# Altium PCB smoothPCB.pcbdoc (part 2 of 2)
Units mm, origin at the board's own origin, x right, y up, seen from the top; angles counter-clockwise.
Board outline 116.3 x 89.84 mm, 2 copper layers (Top Layer, Bottom Layer); 42 components, 86 nets, 257 pads, 168 vias.
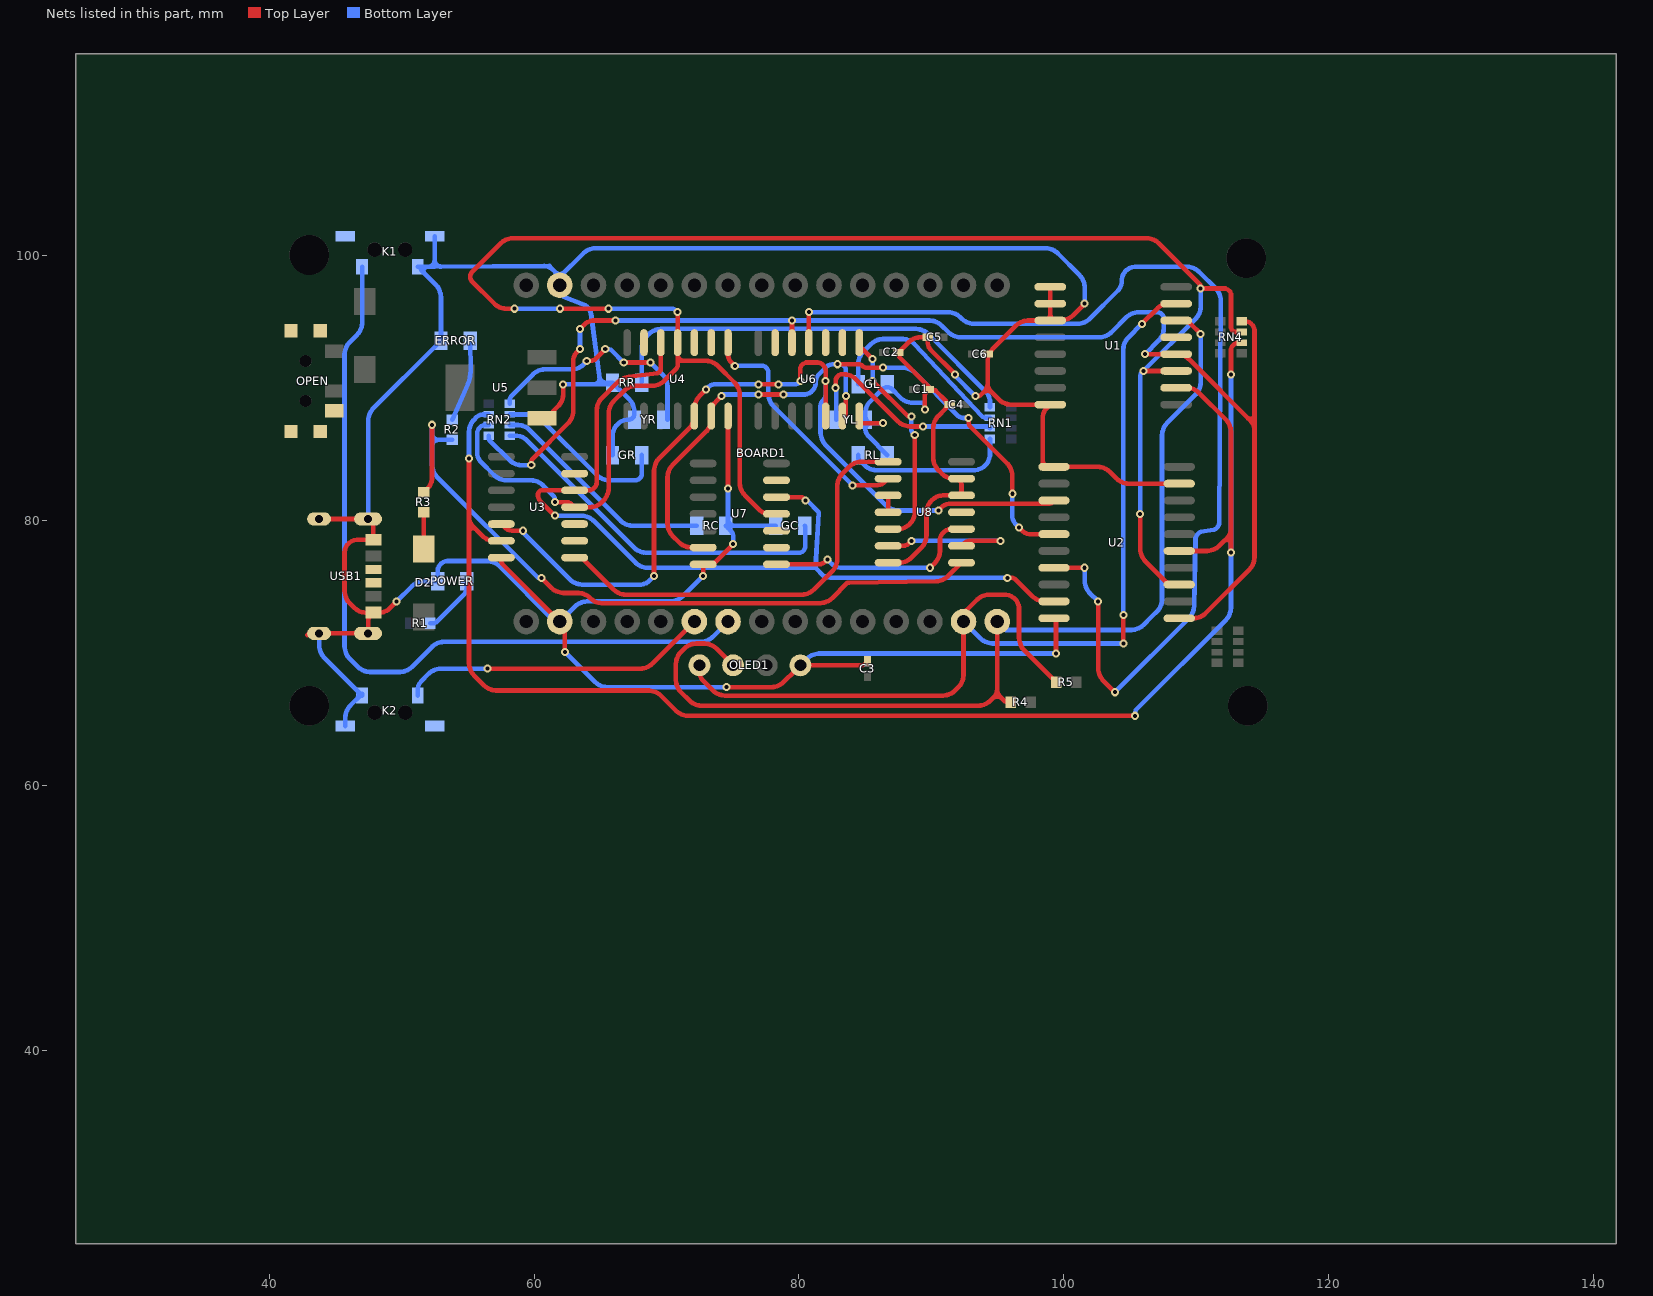
[diagram p2: the nets of this part, all layers, seen from the top]

## Via types
v1: diameter 0.61, hole 0.305, Top Layer to Bottom Layer, 168 vias

## Nets (pads, with @x,y where several pads share a name; then routed paths per layer and width w, separated by ;. In a path a pad name is that pad's centre, name@x,y a point inside that pad or via, vN(x,y) a via of type N, cw(c..) or ccw(c..) an arc to the next point about the centre after c; other vN are vias at no path point) (continued)
E`: U2.3 U3.5 U4.5 U6.5 | length 67.9
  Top Layer w0.35: U3.5@57.525,79.744 57.839,79.43 57.981,79.335 58.139,79.269 58.307,79.236 v1(59.151,79.236) ; v1(69.057,75.807) 69.057,83.804 69.07,83.941 69.097,84.076 69.137,84.208 69.19,84.335 69.255,84.457 69.332,84.572 69.419,84.678 71.743,87.002 71.83,87.108 71.907,87.223 71.972,87.345 72.025,87.472 72.065,87.604 72.091,87.739 72.105,87.876 72.105,88.503 72.118,88.64 72.145,88.775 72.185,88.907 72.238,89.034 72.303,89.156 72.38,89.271 72.467,89.377 v1(72.994,89.904) ; v1(76.931,90.285) v1(78.455,90.285) ; v1(80.106,90.539) 80.106,91.523 80.184,91.712 80.33,91.857 80.519,91.936 81.425,91.936 81.55,91.911 81.669,91.862 81.775,91.791 81.866,91.7 81.937,91.594 81.986,91.475 82.011,91.35 v1(82.011,90.539) U6.5@82.011,87.897 ; v1(90.52,80.76) 90.834,81.074 90.976,81.169 91.134,81.235 91.302,81.268 98.905,81.268 99.064,81.334 U2.3@99.252,81.522
  Bottom Layer w0.35: v1(59.151,79.236) 59.151,79.109 62.726,75.534 62.832,75.447 62.947,75.37 63.069,75.305 63.196,75.252 63.328,75.212 63.463,75.185 63.6,75.172 68.08,75.172 68.289,75.214 68.486,75.295 68.664,75.414 v1(69.057,75.807) ; v1(72.994,89.904) 73.23,90.14 73.336,90.211 73.455,90.26 73.58,90.285 v1(76.931,90.285) ; v1(78.455,90.285) 79.759,90.285 79.918,90.351 v1(80.106,90.539) ; v1(82.011,90.539) 82.011,89.474 81.986,89.349 81.937,89.23 81.866,89.124 81.775,89.033 81.704,88.927 81.655,88.808 81.63,88.683 81.63,86.606 81.643,86.469 81.67,86.334 81.71,86.202 81.763,86.075 81.828,85.953 81.905,85.838 81.992,85.732 86.602,81.122 86.708,81.035 86.823,80.958 86.945,80.893 87.072,80.84 87.204,80.8 87.339,80.773 87.476,80.76 v1(90.52,80.76)
ERROR_2: ERROR.2 R2.1 | length 6.3
  Bottom Layer w0.35: R2.1@53.817,87.609 55.004,90.314 55.055,90.451 55.1,90.591 55.136,90.734 55.165,90.878 55.187,91.023 55.2,91.17 55.206,91.316 ERROR.2@55.171,93.587
F: RN2.7 RN4.2 U1.10 U2.15 U3.6 | length 128.4
  Top Layer w0.35: 55.087,79.146 cw(c55.387,79.146) 55.599,79.359 ; 55.087,80.245 ccw(c55.991,80.245) 55.352,79.606 ; v1(55.087,84.697) 55.087,79.871 ; U3.6@57.525,78.474 56.881,78.474 56.638,78.522 56.409,78.617 56.203,78.754 55.087,79.871 ; v1(105.379,65.266) 71.601,65.266 71.464,65.279 71.329,65.306 71.197,65.346 71.07,65.399 70.948,65.464 70.833,65.541 70.727,65.628 69.546,66.809 69.44,66.896 69.325,66.973 69.203,67.038 69.076,67.091 68.944,67.131 68.809,67.157 68.672,67.171 57.123,67.171 56.986,67.184 56.851,67.211 56.719,67.251 56.592,67.304 56.47,67.369 56.355,67.446 56.249,67.533 55.449,68.333 55.362,68.439 55.285,68.554 55.22,68.676 55.167,68.803 55.127,68.935 55.1,69.07 55.087,69.207 55.087,79.871 ; U1.10@108.478,90.031 109.312,90.031 109.449,90.017 109.584,89.991 109.716,89.951 109.843,89.898 109.965,89.833 110.08,89.756 110.186,89.669 112.256,87.599 112.343,87.493 112.42,87.378 112.485,87.256 112.538,87.129 112.578,86.997 112.604,86.862 112.618,86.725 112.618,78.982 ; U2.15@108.712,77.712 110.172,77.712 110.836,77.712 110.973,77.725 111.108,77.752 111.24,77.792 111.367,77.845 111.489,77.91 111.604,77.987 111.71,78.074 112.618,78.982 ; 112.106,78.47 cw(c112.318,78.258) 112.618,78.258 ; 112.353,78.717 ccw(c111.714,79.356) 112.618,79.356 ; v1(112.618,77.585) 112.618,78.982 ; v1(112.618,91.047) 112.618,92.946 112.712,93.173 112.899,93.36 113.094,93.441 RN4.2@113.418,93.441
  Bottom Layer w0.35: v1(55.087,84.697) 55.087,86.75 55.1,86.881 55.125,87.009 55.163,87.134 55.214,87.255 55.275,87.371 55.348,87.48 55.431,87.581 55.678,87.828 55.817,87.921 55.972,87.985 56.137,88.018 RN2.7@56.573,88.018 ; v1(105.379,65.266) 105.379,65.548 105.449,65.717 112.256,72.524 112.343,72.63 112.42,72.745 112.485,72.867 112.538,72.994 112.578,73.126 112.604,73.261 112.618,73.398 v1(112.618,77.585) v1(112.618,91.047)
F`: U2.5 U4.6 U6.6 U7.6 | length 53.4
  Top Layer w0.35: U7.6@72.765,77.966 71.855,77.966 71.718,77.979 71.583,78.006 71.451,78.046 71.324,78.099 71.202,78.164 71.087,78.241 70.981,78.328 70.435,78.874 70.348,78.98 70.271,79.095 70.206,79.217 70.153,79.344 70.113,79.476 70.086,79.611 70.073,79.748 70.073,83.296 70.086,83.433 70.113,83.568 70.153,83.7 70.206,83.827 70.271,83.949 70.348,84.064 70.435,84.17 73.013,86.748 73.1,86.854 73.177,86.969 73.242,87.091 73.295,87.218 73.335,87.35 73.361,87.485 73.375,87.622 73.375,88.159 73.388,88.286 73.412,88.412 73.45,88.534 73.498,88.652 73.559,88.765 73.63,88.871 73.711,88.97 v1(74.137,89.396) ; v1(76.931,89.523) v1(78.836,89.523) ; v1(82.9,91.809) 84.585,91.809 84.744,91.743 84.866,91.621 85.025,91.555 v1(86.329,91.555) ; U6.6@83.281,87.897 83.461,87.897 83.535,87.972 v1(83.535,89.396) ; v1(92.806,87.745) 92.806,87.369 92.899,87.144 95.746,84.297 95.833,84.191 95.91,84.076 95.975,83.954 96.028,83.827 96.068,83.695 96.094,83.56 96.108,83.423 v1(96.108,82.03) ; v1(96.616,79.49) 96.93,79.176 97.072,79.081 97.23,79.015 97.398,78.982 U2.5@99.252,78.982
  Bottom Layer w0.35: v1(74.137,89.396) 74.264,89.523 v1(76.931,89.523) ; v1(78.836,89.523) 80.467,89.523 80.635,89.556 80.793,89.622 80.935,89.717 81.055,89.837 81.15,89.979 81.216,90.137 81.249,90.305 81.249,90.503 81.284,90.68 81.354,90.848 81.454,90.998 82.094,91.638 82.219,91.722 82.359,91.779 82.507,91.809 v1(82.9,91.809) 83.188,91.809 83.347,91.743 83.469,91.621 83.535,91.462 v1(83.535,89.396) ; v1(86.329,91.555) 87.849,91.555 87.986,91.541 88.121,91.515 88.253,91.475 88.38,91.422 88.502,91.357 88.617,91.28 88.723,91.193 92,87.916 92.125,87.832 92.265,87.774 92.413,87.745 v1(92.806,87.745) ; v1(96.108,82.03) 96.108,80.272 96.141,80.104 96.207,79.946 96.302,79.804 v1(96.616,79.49)
G: RN2.6 RN4.3 U1.11 U2.13 U3.11 U4.11 U7.11 | length 158.3
  Top Layer w0.35: v1(58.516,96) 57.761,96 57.748,96.013 57.613,96.04 57.481,96.08 57.354,96.133 57.232,96.198 57.117,96.275 57.011,96.362 55.252,98.121 55.174,98.31 55.174,98.516 55.252,98.705 57.519,100.972 57.625,101.059 57.74,101.136 57.862,101.201 57.989,101.254 58.121,101.294 58.256,101.32 58.393,101.334 106.264,101.334 106.401,101.32 106.536,101.294 106.668,101.254 106.795,101.201 106.917,101.136 107.032,101.059 107.138,100.972 110.285,97.825 110.332,97.712 110.332,97.598 110.406,97.524 112.205,97.524 112.394,97.445 112.54,97.3 112.618,97.111 112.618,94.56 112.679,94.413 112.791,94.301 112.938,94.24 RN4.3@113.418,94.24 ; v1(61.564,81.395) 62.477,81.395 62.602,81.37 62.721,81.321 62.827,81.25 62.918,81.159 63.024,81.088 63.143,81.039 63.268,81.014 64.227,81.014 64.364,81.027 64.499,81.054 64.631,81.094 64.758,81.147 64.88,81.212 64.995,81.289 65.101,81.376 65.266,81.541 65.353,81.647 65.43,81.762 65.495,81.884 65.548,82.011 65.588,82.143 65.614,82.278 65.628,82.415 65.628,88.122 65.641,88.259 65.668,88.394 65.708,88.526 65.761,88.653 65.826,88.775 65.903,88.89 65.99,88.996 66.815,89.821 66.922,89.909 67.036,89.985 67.158,90.05 67.285,90.103 67.417,90.143 67.552,90.17 67.69,90.183 68.951,90.183 69.088,90.197 69.224,90.224 69.355,90.264 69.483,90.316 69.604,90.381 69.719,90.458 69.826,90.545 70.742,91.462 70.835,91.687 70.835,92.063 ; v1(61.945,96) v1(65.628,96) ; U4.11@70.835,92.54 ccw(c71.312,92.54) 71.312,92.063 ; v1(70.835,95.746) U4.11@70.835,93.435 70.835,92.063 ; U7.11@78.303,80.506 77.69,80.506 77.458,80.552 77.241,80.642 77.045,80.773 75.896,81.922 75.809,82.028 75.732,82.143 75.667,82.265 75.614,82.392 75.574,82.524 75.547,82.659 75.534,82.796 75.534,89.519 75.52,89.656 75.494,89.791 75.454,89.923 75.401,90.05 75.336,90.172 75.259,90.287 75.172,90.393 73.864,91.701 73.758,91.788 73.643,91.865 73.521,91.93 73.394,91.983 73.262,92.023 73.127,92.049 72.99,92.063 70.835,92.063 ; v1(105.76,80.506) 105.76,77.843 105.773,77.706 105.8,77.571 105.84,77.439 105.893,77.312 105.958,77.19 106.035,77.075 106.122,76.969 107.705,75.386 107.862,75.281 108.036,75.209 108.221,75.172 U2.13@108.712,75.172 ; v1(106.014,91.301) U1.11@108.478,91.301
  Bottom Layer w0.35: RN2.6@56.573,87.218 56.211,87.218 55.994,87.128 55.816,86.95 55.722,86.723 55.722,85.459 55.722,84.987 55.757,84.81 55.827,84.642 55.927,84.492 57.011,83.408 57.117,83.321 57.232,83.244 57.354,83.179 57.481,83.126 57.613,83.086 57.748,83.059 57.885,83.046 59.782,83.046 59.919,83.032 60.054,83.006 60.186,82.966 60.313,82.913 60.435,82.848 60.55,82.771 60.656,82.684 61.494,81.846 61.564,81.677 v1(61.564,81.395) ; v1(58.516,96) v1(61.945,96) ; v1(65.628,96) 70.488,96 70.647,95.934 v1(70.835,95.746) ; v1(105.76,80.506) 105.76,90.954 105.826,91.113 v1(106.014,91.301) 109.97,95.257 110.057,95.363 110.134,95.478 110.199,95.6 110.252,95.727 110.292,95.859 110.318,95.994 110.332,96.131 v1(110.332,97.524)
G`: U2.7 U6.11 | length 82.8
  Top Layer w0.35: U6.11@80.741,93.435 v1(80.741,95.746) ; U2.7@99.252,76.442 v1(101.569,76.442) ; v1(102.585,73.902) 102.585,68.826 102.598,68.689 102.625,68.554 102.665,68.422 102.718,68.295 102.783,68.173 102.86,68.058 102.947,67.952 v1(103.855,67.044)
  Bottom Layer w0.35: v1(80.741,95.746) 91.278,95.746 91.415,95.732 91.55,95.706 91.682,95.666 91.809,95.613 91.931,95.548 92.046,95.471 92.152,95.384 92.317,95.219 92.423,95.132 92.538,95.055 92.66,94.99 92.787,94.937 92.919,94.897 93.054,94.87 93.191,94.857 101.057,94.857 101.194,94.87 101.329,94.897 101.461,94.937 101.588,94.99 101.71,95.055 101.825,95.132 101.931,95.219 104.123,97.411 104.241,97.587 104.322,97.782 104.363,97.99 104.363,98.201 104.404,98.408 104.485,98.604 104.603,98.78 104.756,98.933 104.934,99.052 105.131,99.133 105.34,99.175 109.312,99.175 109.449,99.161 109.584,99.135 109.716,99.095 109.843,99.042 109.965,98.977 110.08,98.9 110.186,98.813 111.494,97.505 111.581,97.398 111.658,97.284 111.722,97.162 111.774,97.035 111.814,96.903 111.84,96.768 111.852,96.631 111.732,79.783 111.653,79.576 111.508,79.409 111.313,79.304 110.367,79.168 110.171,79.063 110.023,78.896 109.942,78.688 109.835,73.526 109.819,73.388 109.789,73.253 109.748,73.121 109.693,72.993 109.627,72.872 109.549,72.757 109.461,72.65 v1(103.855,67.044) ; v1(101.569,76.442) 101.569,75.43 101.582,75.293 101.609,75.158 101.649,75.026 101.702,74.899 101.767,74.777 101.844,74.662 101.931,74.556 v1(102.585,73.902)
GC_2: GC.2 RN2.4 | length 27.7
  Bottom Layer w0.35: RN2.4@58.173,86.417 58.736,86.417 58.948,86.374 59.148,86.292 59.327,86.171 67.552,77.947 67.658,77.86 67.773,77.783 67.895,77.718 68.022,77.665 68.154,77.625 68.289,77.598 68.426,77.585 80.074,77.585 80.263,77.663 80.409,77.808 80.487,77.998 80.487,79.574 GC.2@80.444,79.617
GL_2: GL.2 RN1.3 | length 15
  Bottom Layer w0.35: GL.2@84.467,90.285 84.467,91.848 84.481,91.985 84.508,92.12 84.548,92.252 84.6,92.38 84.665,92.501 84.742,92.616 84.829,92.722 85.459,93.352 85.565,93.439 85.68,93.516 85.802,93.581 85.929,93.634 86.061,93.674 86.196,93.7 86.333,93.714 87.85,93.714 87.986,93.7 88.12,93.672 88.25,93.631 88.376,93.577 88.495,93.51 88.607,93.431 88.71,93.341 93.841,87.859 94.057,87.765 RN1.3@94.419,87.764
GND: BOARD1.GND BOARD1.GND@1 C1.1 C2.2 C3.2 C4.1 C5.1 C6.2 ERROR.1 GC.1 GL.1 GR.1 K1.2 K1.4 K2.2 K2.4 OLED1.1 POWER.1 RC.1 RL.1 RR.1 U1.1 U1.2 U1.3 U1.8 U2.1 U2.10 U2.19 U3.7 U4.7 U5.1 U6.7 U7.7 U8.7 U8.12 U8.13 USB1.1 USB1.2 USB1.3 USB1.4 USB1.A12 USB1.B12 YL.1 YR.1 | length 333.9
  Top Layer w0.35: 42.877,71.36 43.004,71.487 47.053,71.487 47.242,71.565 47.387,71.71 47.466,71.9 47.466,72.441 47.492,72.573 47.544,72.697 47.618,72.809 USB1.A12@47.866,73.057 ; USB1.3@43.766,80.127 47.25,80.127 47.382,80.1 47.507,80.049 47.618,79.974 47.714,79.879 47.788,79.767 47.84,79.643 47.866,79.511 47.866,78.97 47.788,78.781 47.643,78.635 47.453,78.557 46.599,78.557 46.404,78.518 46.22,78.442 46.055,78.332 45.914,78.191 45.804,78.026 45.728,77.842 45.689,77.647 45.689,74.668 45.702,74.531 45.729,74.396 45.769,74.264 45.822,74.137 45.887,74.015 45.964,73.9 46.051,73.794 46.452,73.393 46.551,73.312 46.657,73.241 46.77,73.18 46.888,73.131 47.01,73.094 47.136,73.069 47.263,73.057 USB1.A12@47.866,73.057 ; USB1.A12@47.631,72.821 cw(c48.199,72.253) USB1.A12@48.199,73.057 ; v1(49.626,73.902) 49.027,73.303 48.847,73.183 48.646,73.099 48.432,73.057 USB1.A12@47.866,73.057 ; U3.7@57.525,77.204 57.525,76.903 57.6,76.723 61.945,72.378 62.181,72.142 62.252,72.036 62.301,71.917 62.326,71.792 v1(62.326,70.092) ; U5.1@60.599,87.731 60.833,87.731 60.973,87.789 61.837,88.653 61.924,88.759 62.001,88.874 62.066,88.996 62.119,89.123 62.159,89.255 62.185,89.39 62.199,89.527 v1(62.199,90.285) ; v1(72.74,75.807) 72.765,75.832 72.765,76.401 72.821,76.536 72.925,76.64 73.06,76.696 73.227,76.696 73.387,76.728 73.555,76.797 73.701,76.895 v1(75.026,78.22) ; v1(74.518,67.425) 77.944,67.425 78.081,67.438 78.216,67.465 78.348,67.505 78.476,67.558 78.597,67.623 78.712,67.7 78.818,67.787 79.744,68.713 79.85,68.8 79.965,68.877 80.087,68.942 80.214,68.994 80.346,69.034 80.481,69.061 80.618,69.075 84.786,69.075 84.97,69.151 C3.2@85.186,69.367 ; v1(74.645,82.411) U4.7@74.645,87.897 ; U6.7@84.551,87.897 84.551,87.52 84.707,87.364 v1(86.329,87.364) ; U8.7@86.735,76.823 87.595,76.823 87.732,76.836 87.867,76.863 87.999,76.903 88.126,76.956 88.248,77.021 88.363,77.098 88.469,77.185 89.269,77.985 89.356,78.091 89.433,78.206 89.498,78.328 89.551,78.455 89.591,78.587 89.617,78.722 89.631,78.859 89.631,80.666 89.644,80.793 89.668,80.919 89.706,81.041 89.754,81.159 89.815,81.272 89.886,81.378 89.967,81.477 90.057,81.567 90.156,81.648 90.262,81.719 90.375,81.779 90.493,81.828 90.615,81.865 90.741,81.89 90.868,81.903 U8.12@92.273,81.903 92.273,82.76 92.195,82.949 92.05,83.094 91.86,83.173 91.643,83.173 91.514,83.186 91.387,83.211 91.263,83.249 91.136,83.301 91.019,83.364 90.909,83.437 90.807,83.521 90.501,83.827 90.414,83.933 90.337,84.048 90.272,84.17 90.219,84.297 90.179,84.429 90.152,84.564 90.139,84.701 90.139,87.016 90.152,87.153 90.179,87.288 90.219,87.42 90.272,87.548 90.337,87.669 90.414,87.784 90.501,87.89 91.08,88.469 91.158,88.658 91.158,88.863 91.08,89.053 90.308,89.824 90.116,89.904 C1.1@89.796,89.904 ; v1(89.504,88.38) 89.504,89.505 89.58,89.689 C1.1@89.796,89.905 ; v1(91.79,91.047) 89.916,92.921 89.82,93.064 89.752,93.229 89.721,93.386 89.721,93.551 89.666,93.684 89.564,93.786 89.43,93.841 89.123,93.841 88.997,93.829 88.873,93.804 88.751,93.767 88.634,93.718 88.522,93.659 88.417,93.588 88.319,93.508 87.564,92.753 87.51,92.623 87.51,92.482 87.564,92.352 89.796,90.12 C1.1@89.796,89.905 ; U8.12@91.796,81.903 ccw(c91.796,82.38) 92.273,82.38 ; v1(93.314,89.396) 93.558,89.396 93.705,89.457 94.241,89.993 ; 93.904,89.656 cw(c94.241,89.318) 94.578,89.656 ; 93.976,89.728 ccw(c93.337,90.368) 94.241,90.367 ccw(c95.145,90.367) 94.506,89.728 ; U1.3@98.501,95.111 ccw(c98.501,95.588) 98.978,95.588 ccw(c99.455,95.588) U1.3@99.455,95.111 ; U1.1@98.978,97.651 U1.2@98.978,96.381 U1.3@98.978,95.111 ; U2.10@99.252,72.632 99.41,72.474 v1(99.41,69.965) ; v1(101.569,96.381) 100.661,95.473 100.555,95.386 100.44,95.309 100.318,95.244 100.191,95.191 100.059,95.151 99.924,95.124 99.787,95.111 U1.3@98.978,95.111 ; U2.19@108.712,82.792 104.875,82.792 104.738,82.805 104.603,82.832 104.471,82.872 104.344,82.925 104.222,82.99 104.107,83.067 104.001,83.154 103.455,83.7 103.349,83.787 103.234,83.864 103.112,83.929 102.985,83.982 102.853,84.022 102.718,84.048 102.581,84.062 98.807,84.062 98.618,84.14 98.472,84.285 98.394,84.475 98.394,87.862 98.432,88.055 98.507,88.236 98.617,88.399 98.826,88.609 98.763,88.761 95.985,88.761 95.848,88.774 95.713,88.801 95.581,88.841 95.454,88.894 95.332,88.959 95.217,89.036 95.111,89.123 94.241,89.993 ; 94.241,89.993 94.241,92.06 94.255,92.197 94.281,92.332 94.322,92.464 94.374,92.591 94.439,92.713 94.516,92.828 94.603,92.934 96.418,94.749 96.524,94.836 96.639,94.913 96.761,94.978 96.888,95.031 97.02,95.071 97.155,95.097 97.292,95.111 U1.3@98.978,95.111
  Bottom Layer w0.35: USB1.4@43.766,71.487 43.766,70.561 43.779,70.424 43.806,70.289 43.846,70.157 43.899,70.03 43.964,69.908 44.041,69.793 44.128,69.687 K2.2@46.954,66.861 ; K2.4@45.743,64.497 45.743,65.141 45.756,65.277 45.783,65.411 45.823,65.542 45.875,65.669 45.94,65.789 46.016,65.903 46.102,66.008 K2.2@46.954,66.861 ; K2.2@46.617,66.523 ccw(c46.28,66.861) K2.2@46.617,67.198 ; K2.2@47.018,66.797 K2.2@46.954,66.861 ; K2.2@47.018,66.924 K2.2@46.954,66.861 ; USB1.1@47.466,80.127 47.466,87.57 47.479,87.707 47.506,87.842 47.546,87.974 47.599,88.101 47.664,88.223 47.741,88.338 47.828,88.444 52.609,93.225 52.696,93.331 52.773,93.446 52.838,93.568 52.89,93.695 52.931,93.827 52.957,93.962 52.971,94.099 52.971,96.903 52.957,97.04 52.931,97.175 52.89,97.307 52.838,97.434 52.773,97.556 52.696,97.671 52.609,97.777 51.477,98.909 51.456,99.013 51.496,99.11 51.584,99.17 52.493,99.175 ; v1(49.626,73.902) 50.788,75.064 50.894,75.151 51.009,75.228 51.131,75.293 51.258,75.346 51.39,75.386 51.525,75.412 51.662,75.426 POWER.1@52.718,75.426 ; K1.2@51.218,99.168 52.494,99.175 ; 51.728,98.657 cw(c51.941,98.87) 51.939,99.172 ; 52.017,99.172 ccw(c52.014,99.651) 52.493,99.651 ; POWER.1@52.24,75.426 ccw(c52.24,75.903) POWER.1@52.717,75.903 ; 52.493,99.653 ccw(c52.968,99.653) 52.971,99.178 ; K1.4@52.493,101.468 52.493,99.175 ; POWER.1@52.718,75.426 52.717,76.235 52.748,76.388 52.807,76.532 52.894,76.662 53.005,76.773 53.135,76.86 53.279,76.919 53.433,76.95 56.48,76.95 56.617,76.936 56.752,76.91 56.884,76.87 57.011,76.817 57.133,76.752 57.248,76.675 57.354,76.588 61.494,72.448 61.663,72.378 61.846,72.378 62.015,72.448 63.107,73.54 63.213,73.627 63.328,73.704 63.45,73.769 63.577,73.822 63.709,73.862 63.844,73.888 63.981,73.902 70.323,73.902 70.46,73.915 70.595,73.942 70.727,73.982 70.854,74.035 70.976,74.1 71.091,74.177 71.197,74.264 v1(72.74,75.807) ; 60.756,99.224 cw(c60.762,98.326) 61.397,98.961 ; 61.183,99.227 61.131,99.227 ; 61.608,98.75 ccw(c61.945,99.088) 62.282,98.75 ; BOARD1.GND@61.68,98.678 cw(c61.041,98.038) 61.945,98.038 cw(c62.849,98.038) BOARD1.GND@62.21,98.678 ; v1(62.199,90.285) 65.01,90.285 ; v1(62.326,70.092) 64.631,67.787 64.737,67.7 64.852,67.623 64.974,67.558 65.101,67.505 65.233,67.465 65.368,67.438 65.505,67.425 v1(74.518,67.425) ; 64.508,90.285 ccw(c64.508,90.724) 64.944,90.782 ; 64.933,90.863 ccw(c65.448,90.932) RR.1@65.448,90.412 ; GR.1@65.925,84.951 65.925,86.512 65.972,86.749 66.065,86.972 66.199,87.173 66.393,87.367 66.577,87.49 66.789,87.578 66.991,87.618 67.203,87.618 67.374,87.689 67.505,87.82 67.576,87.991 67.576,88.257 67.563,88.392 67.536,88.525 67.497,88.655 67.445,88.78 67.381,88.9 67.306,89.012 67.22,89.117 RR.1@65.925,90.412 ; RC.1@74.645,80.094 ccw(c75.122,80.094) 75.122,79.617 ; v1(74.645,82.411) RC.1@74.645,79.617 ; v1(75.026,78.22) 75.026,78.861 75.001,78.986 74.952,79.105 74.881,79.211 RC.1@74.645,79.447 ; GC.1@78.244,79.617 RC.1@74.645,79.617 ; OLED1.1@80.106,69.075 80.634,69.603 80.741,69.69 80.855,69.767 80.977,69.832 81.104,69.885 81.236,69.925 81.371,69.951 81.508,69.965 v1(99.41,69.965) ; 85.016,86.91 cw(c85.47,86.91) YL.1@85.47,87.364 ; YL.1@85.016,87.841 ccw(c85.493,87.841) YL.1@85.493,87.364 ; v1(86.329,87.364) YL.1@85.016,87.364 ; RL.1@86.667,84.951 85.221,86.397 85.121,86.547 85.051,86.715 85.016,86.892 YL.1@85.016,87.364 ; v1(89.504,88.38) 89.504,88.739 89.355,88.888 88.576,88.888 88.439,88.901 88.304,88.928 88.172,88.968 88.044,89.021 87.923,89.086 87.808,89.163 87.702,89.25 86.959,89.993 86.769,90.071 86.564,90.071 86.375,89.993 85.29,88.908 85.156,88.707 85.063,88.484 85.016,88.247 YL.1@85.016,87.618 ; v1(91.79,91.047) 91.79,90.92 v1(93.314,89.396) ; v1(101.569,96.381) 101.569,97.647 101.555,97.784 101.529,97.919 101.489,98.051 101.436,98.178 101.371,98.3 101.294,98.415 101.207,98.521 99.518,100.21 99.412,100.297 99.297,100.374 99.175,100.439 99.048,100.492 98.916,100.532 98.781,100.558 98.644,100.572 64.616,100.572 64.479,100.558 64.344,100.532 64.212,100.492 64.085,100.439 63.963,100.374 63.848,100.297 63.742,100.21 BOARD1.GND@61.945,98.413 ; 52.493,99.175 61.131,99.227 ; 61.131,99.227 BOARD1.GND@61.945,98.413 ; BOARD1.GND@61.945,98.413 BOARD1.GND@61.945,97.778 61.945,97.313 61.995,97.152 62.09,97.013 62.222,96.908 63.766,96.308 63.878,96.246 63.98,96.171 64.071,96.082 64.149,95.982 64.214,95.873 64.263,95.755 64.297,95.633 64.993,90.412 ; 64.993,90.412 RR.1@65.925,90.412 ; 64.993,90.412 65.01,90.285 ; 65.01,90.285 65.798,90.285 RR.1@65.925,90.412 ; RC.1@74.645,79.447 RC.1@74.645,79.617 ; RC.1@74.645,79.447 RC.1@74.475,79.617 RC.1@74.645,79.617 ; YL.1@85.016,87.364 YL.1@85.016,87.618 ; YL.1@85.016,87.364 YL.1@85.016,87.618
GR_2: GR.2 RN2.2 | length 13.6
  Bottom Layer w0.35: RN2.2@58.173,88.018 59.636,88.018 59.773,88.004 59.908,87.977 60.04,87.937 60.168,87.885 60.289,87.82 60.404,87.743 60.51,87.656 64.758,83.408 64.864,83.321 64.979,83.244 65.101,83.179 65.228,83.126 65.36,83.086 65.495,83.059 65.632,83.046 67.712,83.046 67.901,83.124 68.046,83.269 68.125,83.459 GR.2@68.125,84.951
H: RN2.5 RN4.4 U1.12 U2.11 U6.12 | length 106.8
  Top Layer w0.35: v1(59.786,84.189) 59.786,84.471 59.856,84.64 62.599,87.383 62.686,87.489 62.763,87.604 62.828,87.726 62.881,87.853 62.921,87.985 62.947,88.12 62.961,88.257 62.961,92.17 62.994,92.338 63.06,92.496 63.155,92.638 v1(63.469,92.952) ; v1(63.469,94.476) 63.862,94.869 64.04,94.988 64.237,95.069 64.446,95.111 v1(66.136,95.111) ; U6.12@79.471,93.435 v1(79.471,95.111) ; U1.12@108.478,92.571 v1(106.141,92.571) 108.55,92.571 108.687,92.557 108.822,92.531 108.954,92.491 109.081,92.438 109.203,92.373 109.318,92.296 109.424,92.209 114.396,87.237 114.396,77.208 114.382,77.071 114.356,76.936 114.316,76.804 114.263,76.677 114.198,76.555 114.121,76.44 114.034,76.334 110.694,72.994 110.588,72.907 110.473,72.83 110.351,72.765 110.224,72.712 110.092,72.672 109.957,72.645 109.82,72.632 U2.11@108.712,72.632 ; RN4.4@113.418,95.041 113.752,95.041 113.878,95.016 113.997,94.967 114.104,94.895 114.229,94.77 114.311,94.647 114.367,94.511 114.396,94.367 114.396,87.364 ; 113.884,87.749 ccw(c114.096,87.961) 114.396,87.961 ; 114.131,87.502 cw(c113.492,86.862) 114.396,86.862
  Bottom Layer w0.35: RN2.5@56.573,86.418 56.573,86.206 56.626,86.079 58.154,84.551 58.26,84.464 58.375,84.387 58.497,84.322 58.624,84.269 58.756,84.229 58.891,84.202 59.028,84.189 v1(59.786,84.189) ; v1(63.469,92.952) v1(63.469,94.476) ; v1(66.136,95.111) v1(79.471,95.111) 89.881,95.111 90.018,95.097 90.153,95.071 90.285,95.031 90.412,94.978 90.534,94.913 90.649,94.836 90.755,94.749 91.301,94.203 91.407,94.116 91.522,94.039 91.644,93.974 91.771,93.921 91.903,93.881 92.038,93.854 92.175,93.841 102.708,93.841 102.845,93.854 102.98,93.881 103.112,93.921 103.239,93.974 103.361,94.039 103.476,94.116 103.582,94.203 104.763,95.384 104.869,95.471 104.984,95.548 105.106,95.613 105.233,95.666 105.365,95.706 105.5,95.732 105.637,95.746 107.125,95.746 107.314,95.667 107.46,95.522 107.538,95.333 107.538,94.48 107.524,94.343 107.498,94.208 107.458,94.076 107.405,93.949 107.34,93.827 107.263,93.712 107.176,93.606 v1(106.141,92.571)
H`: U2.9 U3.12 U4.12 U7.12 | length 68.8
  Top Layer w0.35: v1(61.564,80.379) 60.465,81.478 60.381,81.603 60.321,81.748 60.294,81.886 60.294,82.03 60.342,82.146 60.432,82.236 60.548,82.284 64.153,82.284 64.278,82.309 64.397,82.358 64.503,82.429 64.594,82.52 64.665,82.626 64.714,82.745 64.739,82.87 64.739,88.376 64.752,88.513 64.779,88.648 64.819,88.78 64.872,88.907 64.937,89.029 65.014,89.144 65.101,89.25 66.278,90.427 66.386,90.519 66.502,90.602 66.623,90.674 66.751,90.737 66.882,90.789 67.018,90.83 67.157,90.86 69.315,91.141 69.432,91.203 69.519,91.302 69.565,91.426 69.565,91.809 U4.12@69.565,93.435 ; U7.12@78.303,81.776 80.233,81.776 v1(80.487,81.522) ; v1(95.727,75.68) 96.103,75.68 96.328,75.587 97.651,74.264 97.757,74.177 97.872,74.1 97.994,74.035 98.121,73.982 98.253,73.942 98.388,73.915 98.525,73.902 U2.9@99.252,73.902
  Bottom Layer w0.35: v1(61.564,80.379) 63.728,80.379 63.997,80.298 64.124,80.247 64.246,80.181 64.361,80.105 64.467,80.016 67.678,76.805 67.784,76.716 67.899,76.64 68.021,76.574 68.148,76.523 68.417,76.442 81.249,76.442 ; v1(80.487,81.522) 80.614,81.522 81.503,80.633 81.249,76.442 ; v1(95.727,75.68) 82.354,75.68 82.143,75.721 81.947,75.804 81.887,75.804 81.249,76.442
K1: BOARD1.D17 K1.1 | length 60.4
  Bottom Layer w0.35: K1.1@47.018,99.168 47.017,94.919 47.004,94.782 46.977,94.647 46.937,94.515 46.884,94.388 46.819,94.266 46.743,94.152 46.655,94.045 46.051,93.441 45.964,93.335 45.887,93.22 45.822,93.098 45.769,92.971 45.729,92.839 45.702,92.704 45.689,92.567 45.689,70.477 45.702,70.34 45.729,70.205 45.769,70.073 45.822,69.946 45.887,69.824 45.964,69.709 46.051,69.603 46.724,68.93 46.83,68.843 46.945,68.766 47.067,68.701 47.194,68.648 47.326,68.608 47.461,68.581 47.598,68.568 49.876,68.568 50.013,68.581 50.148,68.608 50.28,68.648 50.407,68.701 50.529,68.766 50.644,68.843 50.75,68.93 52.312,70.492 52.418,70.579 52.533,70.656 52.655,70.721 52.782,70.774 52.914,70.814 53.049,70.84 53.186,70.854 72.609,70.854 72.746,70.867 72.881,70.894 73.013,70.934 73.14,70.987 73.262,71.052 73.377,71.129 73.483,71.216 BOARD1.D17@74.645,72.378
K1_3: K1.3
K2: BOARD1.D16 K2.1 | length 23.5
  Top Layer w0.35: v1(56.484,68.822) 68.037,68.822 68.174,68.835 68.309,68.862 68.441,68.902 68.568,68.955 68.69,69.02 68.805,69.097 68.911,69.184 BOARD1.D16@72.105,72.378
  Bottom Layer w0.35: K2.1@51.218,66.797 51.219,67.307 51.257,67.499 51.332,67.68 51.44,67.842 52.058,68.46 52.164,68.547 52.279,68.624 52.401,68.689 52.528,68.742 52.66,68.782 52.795,68.808 52.932,68.822 v1(56.484,68.822)
K2_3: K2.3
OPEN_0: OPEN.0
OPEN_3: OPEN.3
POWER_2: POWER.2 R1.1 | length 4.5
  Bottom Layer w0.35: R1.1@52.158,72.251 52.446,72.251 52.618,72.322 54.7,74.404 54.806,74.563 54.879,74.74 54.917,74.928 POWER.2@54.918,75.426
R3_2: D2.2 R3.2 | length 2.8
  Top Layer w0.35: D2.2@51.658,77.864 R3.2@51.658,80.642
RC_2: RC.2 RN2.3 | length 17.1
  Bottom Layer w0.35: RN2.3@58.173,87.218 58.802,87.218 58.935,87.205 59.065,87.179 59.193,87.14 59.316,87.089 59.434,87.026 59.545,86.952 59.648,86.867 66.536,79.979 66.642,79.892 66.757,79.815 66.879,79.75 67.006,79.697 67.138,79.657 67.273,79.63 67.41,79.617 RC.2@72.275,79.617
RL_2: RL.2 RN1.1 | length 12.4
  Bottom Layer w0.35: RL.2@84.467,84.951 84.467,84.731 84.522,84.599 84.951,84.17 85.057,84.083 85.172,84.006 85.294,83.941 85.421,83.888 85.553,83.848 85.688,83.821 85.825,83.808 93.305,83.808 93.544,83.855 93.768,83.949 93.971,84.084 94.143,84.256 94.278,84.458 94.371,84.683 94.419,84.922 RN1.1@94.419,86.164
RR_2: RN1.4 RR.2 | length 32.6
  Bottom Layer w0.35: RR.2@68.125,90.412 68.125,93.032 68.138,93.169 68.165,93.304 68.205,93.436 68.258,93.563 68.323,93.685 68.399,93.799 68.487,93.906 68.695,94.114 68.801,94.201 68.916,94.278 69.038,94.343 69.165,94.396 69.297,94.436 69.432,94.462 69.569,94.476 88.865,94.476 89.002,94.462 89.137,94.436 89.269,94.396 89.396,94.343 89.518,94.278 89.633,94.201 89.739,94.114 94.184,89.669 94.299,89.497 94.378,89.305 94.419,89.102 RN1.4@94.419,88.563
SCL: BOARD1.D23 OLED1.3 R4.1 U1.14 | length 79.4
  Top Layer w0.35: OLED1.3@75.026,69.078 73.738,70.365 73.632,70.452 73.517,70.529 73.396,70.594 73.268,70.647 73.136,70.687 73.001,70.713 72.864,70.727 72.236,70.727 72.099,70.713 71.964,70.687 71.832,70.647 71.705,70.594 71.583,70.529 71.468,70.452 71.362,70.365 71.07,70.073 70.983,69.967 70.906,69.852 70.841,69.73 70.788,69.603 70.748,69.471 70.721,69.336 70.708,69.199 70.708,67.937 70.721,67.8 70.748,67.665 70.788,67.533 70.841,67.406 70.906,67.284 70.983,67.169 71.07,67.063 71.743,66.39 71.849,66.303 71.964,66.226 72.086,66.161 72.213,66.108 72.345,66.068 72.48,66.041 72.617,66.028 93.564,66.028 93.701,66.041 93.836,66.068 93.968,66.108 94.095,66.161 94.217,66.226 94.332,66.303 94.438,66.39 94.965,66.917 ; 94.628,66.58 cw(c94.965,66.242) 95.302,66.58 ; 94.7,66.652 ccw(c94.061,67.291) 94.965,67.291 ccw(c95.869,67.291) 95.23,66.652 ; BOARD1.D23@94.965,72.378 94.965,66.917 ; R4.1@95.99,66.282 95.701,66.282 95.528,66.354 94.965,66.917 ; U1.14@108.478,95.111 108.997,95.111 109.192,95.072 109.376,94.996 109.542,94.885 v1(110.332,94.095)
  Bottom Layer w0.35: BOARD1.D23@94.965,72.378 95.6,71.743 105.121,71.743 105.258,71.756 105.393,71.783 105.525,71.823 105.652,71.876 105.774,71.941 105.889,72.018 105.995,72.105 106.649,72.759 107.075,73.185 107.156,73.284 107.227,73.39 107.288,73.503 107.336,73.621 107.374,73.743 107.398,73.869 107.411,73.996 107.411,86.471 107.424,86.608 107.451,86.743 107.491,86.875 107.544,87.002 107.609,87.124 107.686,87.239 107.773,87.345 109.97,89.542 110.057,89.648 110.134,89.763 110.199,89.885 110.252,90.012 110.292,90.144 110.318,90.279 110.332,90.416 v1(110.332,94.095) ; BOARD1.D23@95.335,72.008 ccw(c95.974,72.647) 95.974,71.743
SDA: BOARD1.D22 OLED1.4 R5.1 U1.15 | length 80
  Top Layer w0.35: OLED1.4@72.486,69.078 72.486,68.526 72.527,68.319 72.608,68.123 72.726,67.947 73.521,67.152 73.627,67.065 73.742,66.988 73.864,66.923 73.991,66.87 74.123,66.83 74.258,66.803 74.395,66.79 90.897,66.79 91.034,66.803 91.169,66.83 91.301,66.87 91.428,66.923 91.55,66.988 91.665,67.065 91.771,67.152 92.063,67.444 92.15,67.55 92.227,67.665 92.292,67.787 92.345,67.914 92.385,68.046 92.411,68.181 92.425,68.318 BOARD1.D22@92.425,72.378 92.425,73.013 93.46,74.048 93.566,74.135 93.681,74.212 93.803,74.277 93.93,74.33 94.062,74.37 94.197,74.396 94.334,74.41 95.639,74.41 95.848,74.368 96.045,74.287 96.223,74.168 96.374,74.017 96.493,73.839 96.574,73.642 96.616,73.433 96.616,71.121 96.629,70.984 96.656,70.848 96.696,70.716 96.749,70.589 96.814,70.468 96.891,70.353 96.978,70.246 R5.1@99.419,67.806 ; BOARD1.D22@92.425,72.638 cw(c93.329,72.638) BOARD1.D22@92.69,73.278 ; v1(104.49,70.727) v1(104.49,72.886) ; v1(105.887,94.857) 107.078,96.048 107.176,96.129 107.281,96.199 107.393,96.259 107.51,96.307 107.631,96.344 107.755,96.369 107.881,96.381 U1.15@108.478,96.381
  Bottom Layer w0.35: BOARD1.D22@92.425,72.378 93.714,71.089 93.82,71.002 93.935,70.925 94.057,70.86 94.184,70.807 94.316,70.767 94.451,70.74 94.588,70.727 v1(104.49,70.727) ; v1(104.49,72.886) 104.49,92.948 104.503,93.085 104.53,93.22 104.57,93.352 104.623,93.479 104.688,93.601 104.765,93.716 104.852,93.822 v1(105.887,94.857)
U1_13: U1.13
U3_9: U3.9
U3_10: U3.10
U3_13: U3.13
U4_9: U4.9
U4_10: U4.10
U4_13: U4.13
U6_9: U6.9
U6_10: U6.10
U6_13: U6.13
U7_9: U7.9
U7_10: U7.10
U7_13: U7.13
U8_3: U8.3 U8.4 | length 1.3
  Top Layer w0.35: U8.4@86.735,80.633 U8.3@86.735,81.903
U8_6: U8.6 U8.9 | length 11.7
  Top Layer w0.35: U8.6@86.735,78.093 87.902,78.093 88.027,78.118 88.146,78.167 88.252,78.238 v1(88.488,78.474) ; U8.9@92.273,78.093 92.509,78.329 92.615,78.4 92.734,78.449 92.859,78.474 v1(95.219,78.474)
  Bottom Layer w0.35: v1(88.488,78.474) v1(95.219,78.474)
U8_11: U8.11
USB1_A5: USB1.A5
USB1_B5: USB1.B5
Y: R2.2 R3.1 U8.8 | length 57
  Top Layer w0.35: R3.1@51.658,82.148 52.051,82.541 52.17,82.719 52.251,82.916 52.293,83.126 v1(52.293,87.237) ; v1(60.548,75.68) 61.326,74.902 61.433,74.814 61.547,74.738 61.669,74.673 61.796,74.62 61.928,74.58 62.063,74.553 62.201,74.539 63.371,74.539 63.499,74.527 63.624,74.502 63.747,74.465 63.866,74.416 63.979,74.355 64.085,74.284 64.184,74.203 64.275,74.112 64.374,74.031 64.481,73.959 64.594,73.899 64.712,73.85 64.835,73.813 64.961,73.788 65.088,73.775 81.626,73.775 81.763,73.788 81.898,73.815 82.03,73.855 82.157,73.908 82.279,73.973 82.394,74.05 82.5,74.137 83.66,75.297 83.789,75.299 ; 83.662,75.299 83.789,75.299 ; U8.8@92.273,76.823 91.238,75.789 91.131,75.701 91.017,75.623 90.895,75.557 90.768,75.503 90.636,75.461 90.5,75.432 90.363,75.417 83.789,75.299
  Bottom Layer w0.35: 52.293,85.617 cw(c52.77,85.617) 52.77,86.094 cw(c52.77,86.571) 52.293,86.571 ; v1(52.293,87.237) 52.293,86.094 ; R2.2@53.817,86.094 52.293,86.094 ; v1(60.548,75.68) 60.294,75.68 52.655,83.319 52.568,83.425 52.491,83.54 52.426,83.662 52.373,83.789 52.333,83.921 52.306,84.056 52.293,84.193 52.293,86.094
Y1: U3.8 U8.1 | length 32.5
  Top Layer w0.35: U3.8@63.063,77.204 63.393,77.204 63.517,77.179 63.634,77.131 63.74,77.06 66.028,74.772 66.134,74.685 66.249,74.608 66.371,74.543 66.498,74.49 66.63,74.45 66.765,74.423 66.902,74.41 80.229,74.41 80.366,74.423 80.501,74.45 80.633,74.49 80.76,74.543 80.882,74.608 80.997,74.685 81.103,74.772 82.538,76.207 82.625,76.313 82.702,76.428 82.767,76.55 82.82,76.677 82.86,76.809 82.886,76.944 82.9,77.081 82.9,82.661 82.913,82.798 82.94,82.933 82.98,83.065 83.033,83.192 83.098,83.314 83.175,83.429 83.262,83.535 83.808,84.081 83.914,84.168 84.029,84.245 84.151,84.31 84.278,84.363 84.41,84.403 84.545,84.429 84.682,84.443 U8.1@86.735,84.443
Y2: U4.8 U8.2 | length 18.7
  Top Layer w0.35: U4.8@74.645,93.435 74.645,92.464 74.678,92.296 74.744,92.138 74.839,91.996 v1(75.153,91.682) ; v1(84.043,82.665) 85.953,82.665 86.121,82.698 86.278,82.764 86.421,82.859 U8.2@86.735,83.173
  Bottom Layer w0.35: v1(75.153,91.682) 77.28,91.682 77.469,91.603 77.615,91.458 77.693,91.269 77.693,89.527 77.706,89.39 77.733,89.255 77.773,89.123 77.826,88.996 77.891,88.874 77.968,88.759 78.055,88.653 v1(84.043,82.665)
Y3: U6.8 U8.5 | length 17.4
  Top Layer w0.35: U6.8@84.551,93.435 84.551,93.206 v1(85.567,92.19) ; v1(85.567,90.539) 88.234,87.872 v1(88.488,87.872) ; U8.5@86.735,79.363 87.505,79.363 87.632,79.375 87.758,79.4 87.88,79.438 87.998,79.486 88.111,79.547 88.217,79.618 88.316,79.699 88.406,79.789 88.487,79.888 88.558,79.994 88.619,80.107 88.667,80.225 88.705,80.347 88.729,80.473 88.742,80.6 v1(88.742,86.475)
  Bottom Layer w0.35: v1(85.567,90.539) v1(85.567,92.19) ; v1(88.488,87.872) 88.488,86.822 88.554,86.663 v1(88.742,86.475)
Y4: U7.8 U8.10 | length 16.4
  Top Layer w0.35: U7.8@78.303,76.696 81.552,76.696 81.677,76.721 81.796,76.77 81.902,76.841 v1(82.138,77.077) ; v1(89.885,76.442) 90.311,76.868 90.392,76.967 90.463,77.073 90.524,77.186 90.572,77.304 90.61,77.426 90.634,77.552 90.647,77.679 90.647,78.581 90.68,78.749 90.746,78.907 90.841,79.049 90.961,79.169 91.103,79.264 91.261,79.33 91.429,79.363 U8.10@92.273,79.363
  Bottom Layer w0.35: v1(82.138,77.077) 82.531,76.684 82.709,76.565 82.906,76.484 83.115,76.442 v1(89.885,76.442)
YL_2: RN1.2 YL.2 | length 16.5
  Top Layer w0.35: v1(82.773,90.031) 82.773,90.64 82.85,90.827 82.993,90.97 83.18,91.047 83.412,91.047 83.547,91.034 83.68,91.007 83.81,90.968 83.935,90.916 84.055,90.852 84.167,90.777 84.272,90.691 87.491,87.472 87.597,87.385 87.712,87.308 87.834,87.243 87.961,87.19 88.093,87.15 88.228,87.123 88.365,87.11 v1(89.377,87.11)
  Bottom Layer w0.35: v1(82.773,90.031) 82.816,89.988 YL.2@82.816,87.618 ; v1(89.377,87.11) 94.273,87.11 RN1.2@94.419,86.964
YR_2: RN2.1 YR.2 | length 17.7
  Top Layer w0.35: v1(63.977,92.063) 64.353,92.063 64.578,92.156 v1(65.374,92.952) ; v1(66.771,91.936) v1(68.803,91.936)
  Bottom Layer w0.35: RN2.1@58.173,88.818 58.173,89.18 58.263,89.397 59.932,91.066 60.038,91.153 60.153,91.23 60.275,91.295 60.402,91.348 60.534,91.388 60.669,91.414 60.806,91.428 63,91.428 63.209,91.47 63.406,91.551 63.584,91.67 v1(63.977,92.063) ; v1(65.374,92.952) 65.656,92.952 65.825,92.882 v1(66.771,91.936) ; v1(68.803,91.936) 69.711,91.028 69.798,90.922 69.875,90.807 69.94,90.685 69.993,90.558 70.033,90.426 70.059,90.291 70.073,90.154 YR.2@70.073,87.618
pads on no net: K1. K2. OPEN.

## Other copper
Top Layer:
  drawing of 188 lines, arcs and shapes, not listed
Bottom Layer:
  drawing of 196 lines, arcs and shapes, not listed

## Silkscreen, mask and mechanical layers (free items; w line width, h text height)
Bottom Overlay:
  text "@MGodmonkey" at 110.585,92.606 h2.03 r92
  text "V2.0" at 114.269,84.443 h2.03 r90

## Text inside footprints (layer, text, board x,y; h text height)
BOARD1: Top Overlay "3V3" at 59.805,73.918 h1.02 r90; Top Overlay "GND" at 62.345,73.918 h1.02 r90; Top Overlay "D15" at 64.885,73.918 h1.02 r90; Top Overlay "D2" at 67.425,73.918 h1.02 r90; Top Overlay "D4" at 69.965,73.918 h1.02 r90; Top Overlay "D16" at 72.505,73.918 h1.02 r90; Top Overlay "D17" at 75.045,73.918 h1.02 r90; Top Overlay "D5" at 77.585,73.918 h1.02 r90; Top Overlay "D18" at 80.125,73.918 h1.02 r90; Top Overlay "D19" at 82.665,73.918 h1.02 r90; Top Overlay "D21" at 85.205,73.918 h1.02 r90; Top Overlay "D3" at 87.745,73.918 h1.02 r90; Top Overlay "D1" at 90.285,73.918 h1.02 r90; Top Overlay "D22" at 92.825,73.918 h1.02 r90; Top Overlay "D23" at 95.365,73.918 h1.02 r90; Top Overlay "VIN" at 60.075,93.848 h1.02 r90; Top Overlay "G" at 61.599,93.848 h1.02 r270; Top Overlay "D13" at 65.155,93.848 h1.02 r90; Top Overlay "D12" at 67.695,93.848 h1.02 r90; Top Overlay "D14" at 70.235,93.848 h1.02 r90; Top Overlay "D27" at 72.775,93.848 h1.02 r90; Top Overlay "D26" at 75.315,93.848 h1.02 r90; Top Overlay "D25" at 77.855,93.848 h1.02 r90; Top Overlay "D33" at 80.395,93.848 h1.02 r90; Top Overlay "D32" at 82.935,93.848 h1.02 r90; Top Overlay "D35" at 85.475,93.848 h1.02 r90; Top Overlay "D34" at 88.015,93.848 h1.02 r90; Top Overlay "VN" at 90.901,94.73 h1.02 r90; Top Overlay "VP" at 93.568,94.73 h1.02 r90; Top Overlay "EN" at 95.981,94.73 h1.02 r90; Document "`" at 88.027,86.571 h1.93 r198; Document "ESP32-DEVKITV1" at 85.765,67.838 h1.27; Document "ESP-32-WROOM-32" at 121.381,92.825 h1.02
OLED1: Bottom Overlay "IIC-Connector" at 82.052,58.229 h1.2; Bottom Overlay "0.96'OLED" at 80.294,60.476 h1.2